# EAGLE board MODULO2_1aaa (EAGLE 7.1.0)
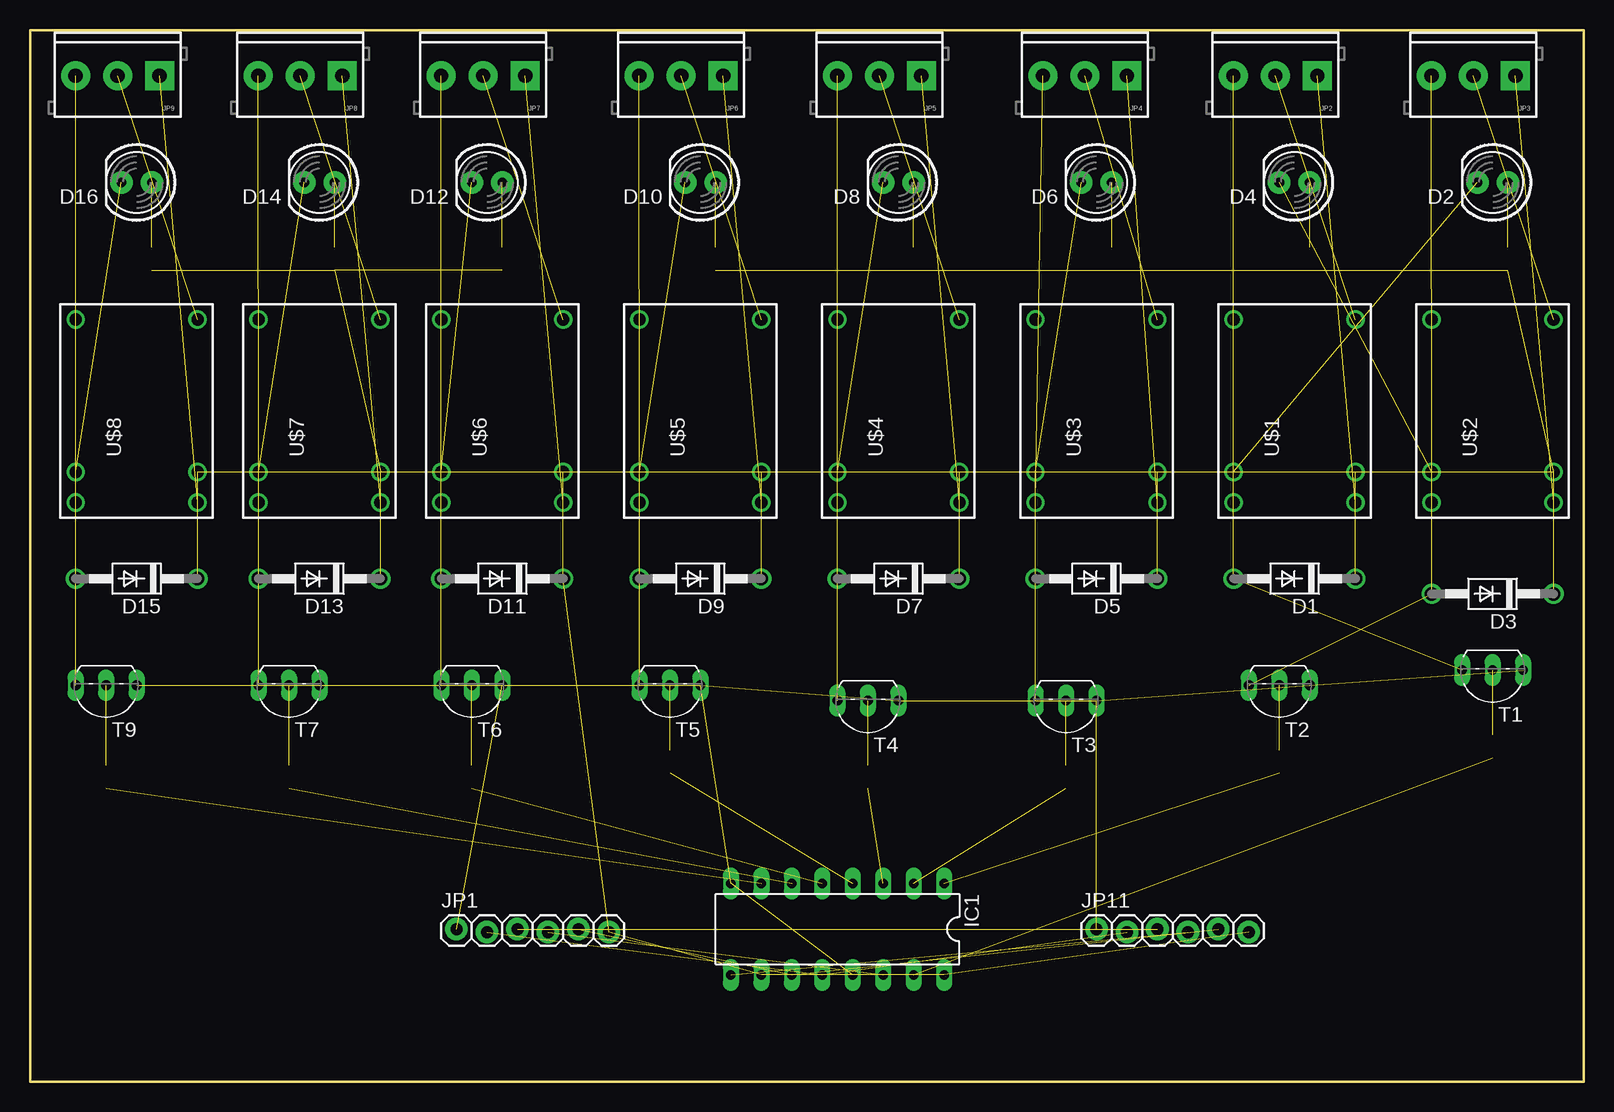
[diagram p0: board, top side]
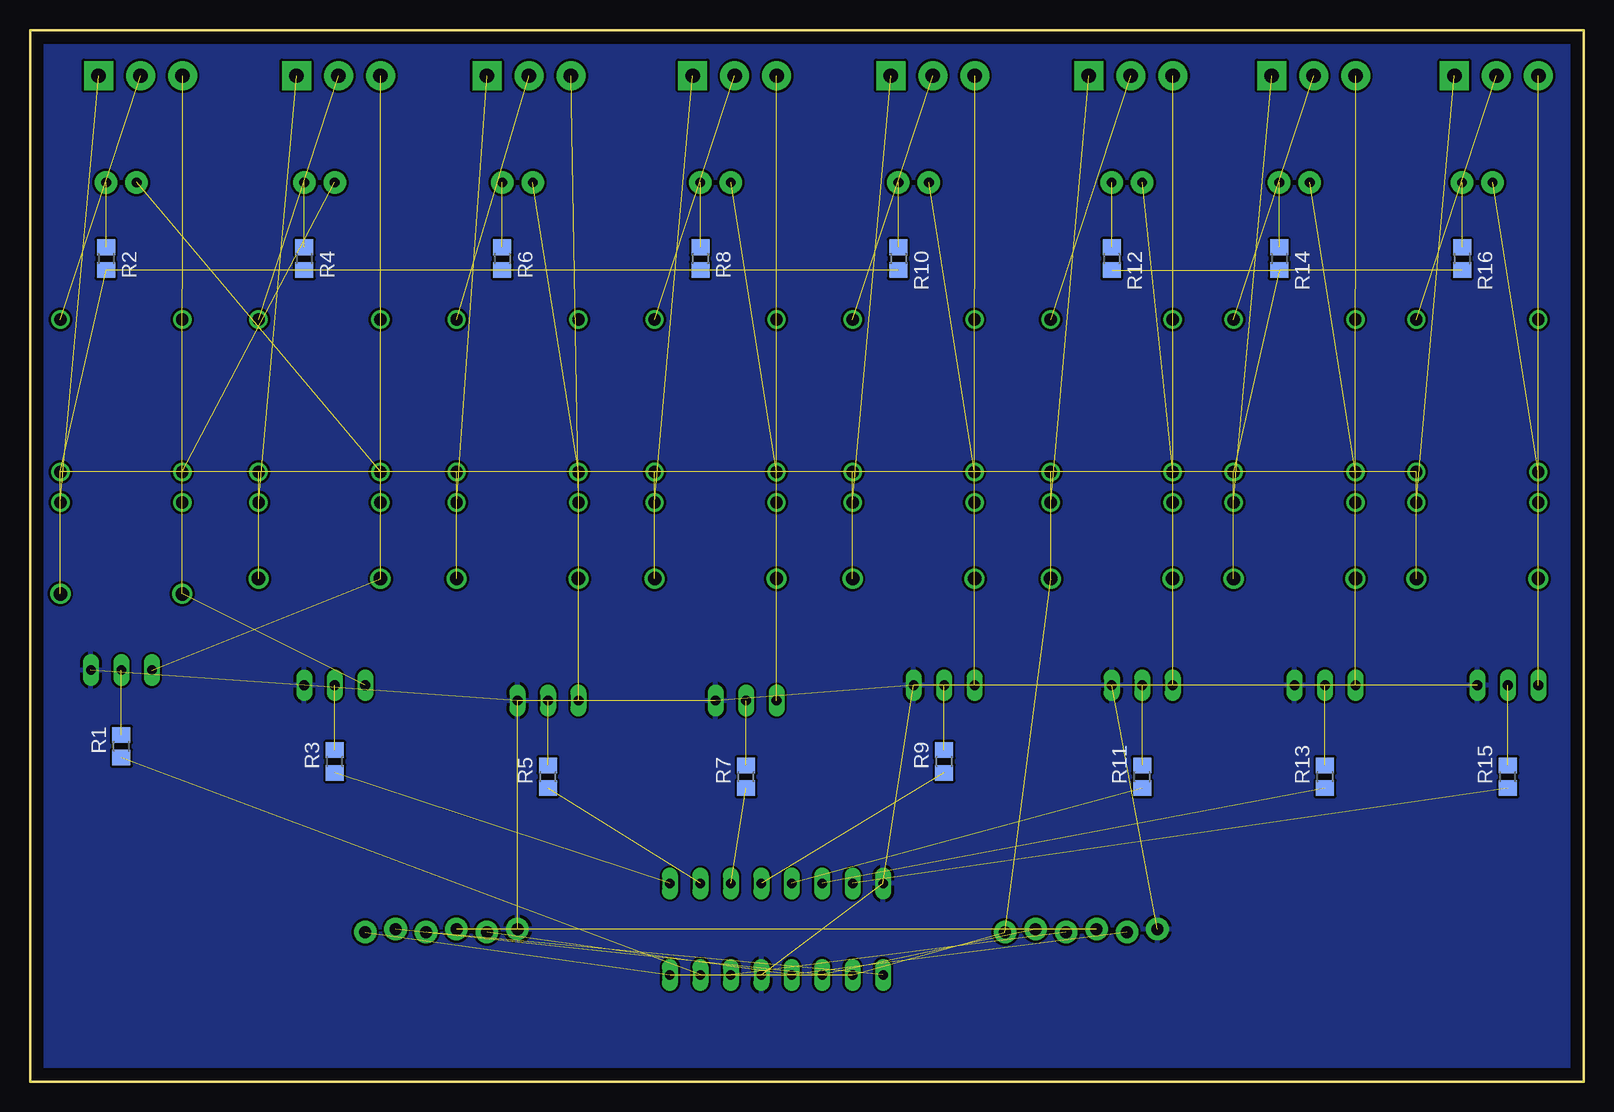
[diagram p1: board, bottom side, seen from below]

Size 129.54 x 87.63 mm. Coordinates in mm from the lower left corner, seen from the top.
Outline: 0,0 129.54,0 129.54,87.63 0,87.63 0,0
Copper layers (1*16): Top 0.035mm / dielectric 1.5mm / Bottom 0.035mm
Design rules "default": minimum track width 10mil, minimum drill 24mil, track to track 8mil, track to pad 8mil, pad to pad 8mil, via to via 8mil, smd to smd 8mil, copper to edge 40mil, drill to drill 8mil, minimum pad ring 10mil, minimum via ring 8mil, stop-mask expansion 4mil, vias tented up to drill 0mil, thermal gap 10mil

## Footprints (pad centres in the part's own frame; a part is rotated, then mirrored left to right if it is on the bottom)
DO41-10 = drill 1.118: A 5.08,0; C -5.08,0
LED5MM = drill 0.813 pad 1.88: A -1.27,0; K 1.27,0
DIL16 = drill 0.813 long: 1 -8.89,-3.81; 2 -6.35,-3.81; 3 -3.81,-3.81; 4 -1.27,-3.81; 5 1.27,-3.81; 6 3.81,-3.81; 7 6.35,-3.81; 8 8.89,-3.81; 9 8.89,3.81; 10 6.35,3.81; 11 3.81,3.81; 12 1.27,3.81; 13 -1.27,3.81; 14 -3.81,3.81; 15 -6.35,3.81; 16 -8.89,3.81
1X06_LOCK = drill 1.016 pad 1.88: 1 0,0; 2 2.54,-0.254; 3 5.08,0; 4 7.62,-0.254; 5 10.16,0; 6 12.7,-0.254
SCREWTERMINAL-3.5MM-3 = drill 1.2 pad 2.413 square: 1 0,0 | drill 1.2 pad 2.413: 2 3.5,0; 3 7,0
R0805 = smd 1.3 x 1.5: 1 -0.95,0; 2 0.95,0
TO92-EBC = drill 0.813 long: B 0,-1.27; C 2.54,-1.27; E -2.54,-1.27
HK4100 = drill 1.016: 1 7.62,5.08; 6 -5.08,5.08; 7 -7.62,5.08; 8 -7.62,-5.08; 9 -5.08,-5.08; 14 7.62,-5.08

## Placement (x,y rotation side)
D1  1N4933  [DO41-10]  105.41,41.91 180 top
D2  [LED5MM]  121.92,74.93 180 top
D3  1N4933  [DO41-10]  121.92,40.64 180 top
D4  [LED5MM]  105.41,74.93 180 top
D5  1N4933  [DO41-10]  88.9,41.91 180 top
D6  [LED5MM]  88.9,74.93 180 top
D7  1N4933  [DO41-10]  72.39,41.91 180 top
D8  [LED5MM]  72.39,74.93 180 top
D9  1N4933  [DO41-10]  55.88,41.91 180 top
D10  [LED5MM]  55.88,74.93 180 top
D11  1N4933  [DO41-10]  39.37,41.91 180 top
D12  [LED5MM]  38.1,74.93 180 top
D13  1N4933  [DO41-10]  24.13,41.91 180 top
D14  [LED5MM]  24.13,74.93 180 top
D15  1N4933  [DO41-10]  8.89,41.91 180 top
D16  [LED5MM]  8.89,74.93 180 top
IC1  74HC595N  [DIL16]  67.31,12.7 180 top
JP1  [1X06_LOCK]  35.56,12.7 0 top
JP2  [SCREWTERMINAL-3.5MM-3]  107.31,83.82 180 top
JP3  [SCREWTERMINAL-3.5MM-3]  123.83,83.82 180 top
JP4  [SCREWTERMINAL-3.5MM-3]  91.44,83.82 180 top
JP5  [SCREWTERMINAL-3.5MM-3]  74.3,83.82 180 top
JP6  [SCREWTERMINAL-3.5MM-3]  57.78,83.82 180 top
JP7  [SCREWTERMINAL-3.5MM-3]  41.27,83.82 180 top
JP8  [SCREWTERMINAL-3.5MM-3]  26.04,83.82 180 top
JP9  [SCREWTERMINAL-3.5MM-3]  10.79,83.82 180 top
JP11  [1X06_LOCK]  88.9,12.7 0 top
R1  [R0805]  121.92,27.94 90 bottom
R2  [R0805]  123.19,68.58 270 bottom
R3  [R0805]  104.14,26.67 90 bottom
R4  [R0805]  106.68,68.58 270 bottom
R5  [R0805]  86.36,25.4 90 bottom
R6  [R0805]  90.17,68.58 270 bottom
R7  [R0805]  69.85,25.4 90 bottom
R8  [R0805]  73.66,68.58 270 bottom
R9  [R0805]  53.34,26.67 90 bottom
R10  [R0805]  57.15,68.58 270 bottom
R11  [R0805]  36.83,25.4 90 bottom
R12  [R0805]  39.37,68.58 270 bottom
R13  [R0805]  21.59,25.4 90 bottom
R14  [R0805]  25.4,68.58 270 bottom
R15  [R0805]  6.35,25.4 90 bottom
R16  [R0805]  10.16,68.58 270 bottom
T1  [TO92-EBC]  121.92,33.02 180 top
T2  [TO92-EBC]  104.14,31.75 180 top
T3  [TO92-EBC]  86.36,30.48 180 top
T4  [TO92-EBC]  69.85,30.48 180 top
T5  [TO92-EBC]  53.34,31.75 180 top
T6  [TO92-EBC]  36.83,31.75 180 top
T7  [TO92-EBC]  21.59,31.75 180 top
T9  [TO92-EBC]  6.35,31.75 180 top
U$1  HK4100_DC5V_SHGHK  [HK4100]  105.41,55.88 90 top
U$2  HK4100_DC5V_SHGHK  [HK4100]  121.92,55.88 90 top
U$3  HK4100_DC5V_SHGHK  [HK4100]  88.9,55.88 90 top
U$4  HK4100_DC5V_SHGHK  [HK4100]  72.39,55.88 90 top
U$5  HK4100_DC5V_SHGHK  [HK4100]  55.88,55.88 90 top
U$6  HK4100_DC5V_SHGHK  [HK4100]  39.37,55.88 90 top
U$7  HK4100_DC5V_SHGHK  [HK4100]  24.13,55.88 90 top
U$8  HK4100_DC5V_SHGHK  [HK4100]  8.89,55.88 90 top

## Library data of the parts
D1 D3 D5 D7 D9 D11 D13 D15 = diode
D2 D4 D6 D8 D10 D12 D14 D16 = SparkFun-LED
IC1 = 74xx-eu
JP1 JP11 = SparkFun-Connectors
JP2-JP9 = SparkFun-Connectors; PROD_ID: CONN-08288
R1-R16 = resistor
T1-T7 T9 = transistor
U$1-U$8 = SparkFun-Electromechanical

## Nets
CS: IC1.12 JP1.2 JP11.2
GND: IC1.8 IC1.13 JP1.1 JP11.1 T1.E T2.E T3.E T4.E T5.E T6.E T7.E T9.E
N$1: IC1.15 R1.1
N$2: IC1.1 R3.1
N$3: D1.A D2.K T1.C U$1.6
N$4: D2.A R2.1
N$5: R1.2 T1.B
N$6: D3.A D4.K T2.C U$2.6
N$7: D5.A D6.K T3.C U$3.6
N$8: D6.A R6.1
N$9: R5.2 T3.B
N$10: D7.A D8.K T4.C U$4.6
N$11: D8.A R8.1
N$12: R7.2 T4.B
N$13: IC1.3 R7.1
N$14: D4.A R4.1
N$15: R3.2 T2.B
N$16: IC1.2 R5.1
N$17: D9.A D10.K T5.C U$5.6
N$18: D10.A R10.1
N$19: R9.2 T5.B
N$20: D11.A D12.K T6.C U$6.6
N$21: D12.A R12.1
N$22: R11.2 T6.B
N$23: D13.A D14.K T7.C U$7.6
N$24: D14.A R14.1
N$25: R13.2 T7.B
N$26: D15.A D16.K T9.C U$8.6
N$27: D16.A R16.1
N$28: R15.2 T9.B
N$29: IC1.5 R11.1
N$30: IC1.4 R9.1
N$31: IC1.6 R13.1
N$32: IC1.7 R15.1
N$33: JP2.1 U$1.8
N$34: JP2.2 U$1.14
N$35: JP2.3 U$1.7
N$36: JP3.1 U$2.8
N$37: JP3.2 U$2.14
N$38: JP3.3 U$2.7
N$39: JP4.1 U$3.8
N$40: JP4.2 U$3.14
N$41: JP4.3 U$3.7
N$42: JP5.1 U$4.8
N$43: JP5.2 U$4.14
N$44: JP5.3 U$4.7
N$45: JP6.1 U$5.8
N$46: JP6.2 U$5.14
N$47: JP6.3 U$5.7
N$48: JP7.1 U$6.8
N$49: JP7.2 U$6.14
N$50: JP7.3 U$6.7
N$51: JP8.1 U$7.8
N$52: JP8.2 U$7.14
N$53: JP8.3 U$7.7
N$54: JP9.1 U$8.8
N$55: JP9.2 U$8.14
N$56: JP9.3 U$8.7
QH: IC1.9 JP11.4
SCLK: IC1.11 JP1.5 JP11.5
SDI: JP1.3 JP11.3
SDO: IC1.14 JP1.4
VCC: D1.C D3.C D5.C D7.C D9.C D11.C D13.C D15.C IC1.10 IC1.16 JP1.6 JP11.6 R2.2 R4.2 R6.2 R8.2 R10.2 R12.2 R14.2 R16.2 U$1.9 U$2.9 U$3.9 U$4.9 U$5.9 U$6.9 U$7.9 U$8.9

## Tracks (layer width: path | path; a pad name or v marks a point on that pad's centre or on a via)
CS  (2 unrouted)
GND  (11 unrouted)
  pour Bottom: 0,0 0,86.36 0,87.63 129.54,87.63 129.54,0
N$1  (1 unrouted)
N$2  (1 unrouted)
N$3  (3 unrouted)
N$4  (1 unrouted)
N$5  (1 unrouted)
N$6  (3 unrouted)
N$7  (3 unrouted)
N$8  (1 unrouted)
N$9  (1 unrouted)
N$10  (3 unrouted)
N$11  (1 unrouted)
N$12  (1 unrouted)
N$13  (1 unrouted)
N$14  (1 unrouted)
N$15  (1 unrouted)
N$16  (1 unrouted)
N$17  (3 unrouted)
N$18  (1 unrouted)
N$19  (1 unrouted)
N$20  (3 unrouted)
N$21  (1 unrouted)
N$22  (1 unrouted)
N$23  (3 unrouted)
N$24  (1 unrouted)
N$25  (1 unrouted)
N$26  (3 unrouted)
N$27  (1 unrouted)
N$28  (1 unrouted)
N$29  (1 unrouted)
N$30  (1 unrouted)
N$31  (1 unrouted)
N$32  (1 unrouted)
N$33  (1 unrouted)
N$34  (1 unrouted)
N$35  (1 unrouted)
N$36  (1 unrouted)
N$37  (1 unrouted)
N$38  (1 unrouted)
N$39  (1 unrouted)
N$40  (1 unrouted)
N$41  (1 unrouted)
N$42  (1 unrouted)
N$43  (1 unrouted)
N$44  (1 unrouted)
N$45  (1 unrouted)
N$46  (1 unrouted)
N$47  (1 unrouted)
N$48  (1 unrouted)
N$49  (1 unrouted)
N$50  (1 unrouted)
N$51  (1 unrouted)
N$52  (1 unrouted)
N$53  (1 unrouted)
N$54  (1 unrouted)
N$55  (1 unrouted)
N$56  (1 unrouted)
QH  (1 unrouted)
SCLK  (2 unrouted)
SDI  (1 unrouted)
SDO  (1 unrouted)
VCC  (27 unrouted)